# Altium PCB LAB1.PcbDoc
Units mil, origin at the board's own origin, x right, y up, seen from the top; angles counter-clockwise.
Board outline 6000 x 4000 mil, 2 copper layers (Top Layer, Bottom Layer); 35 components, 35 nets, 96 pads, 57 vias.
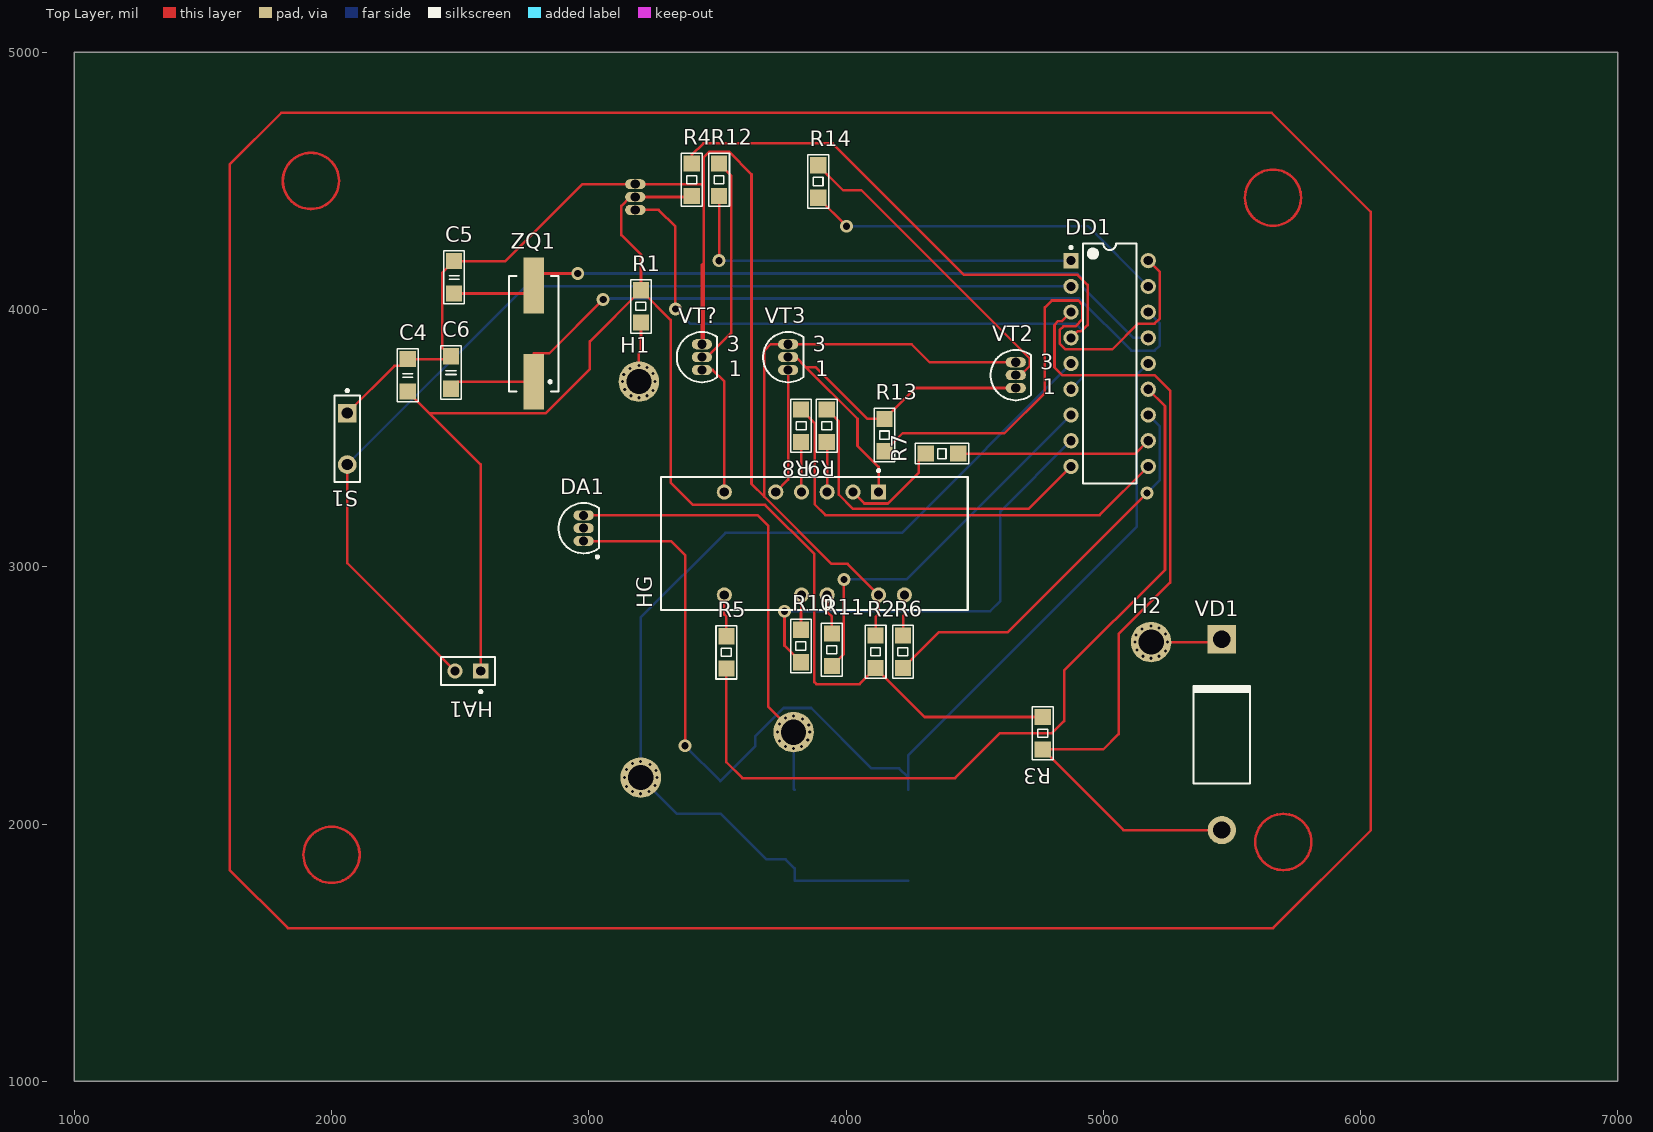
[diagram p0: Top Layer view]
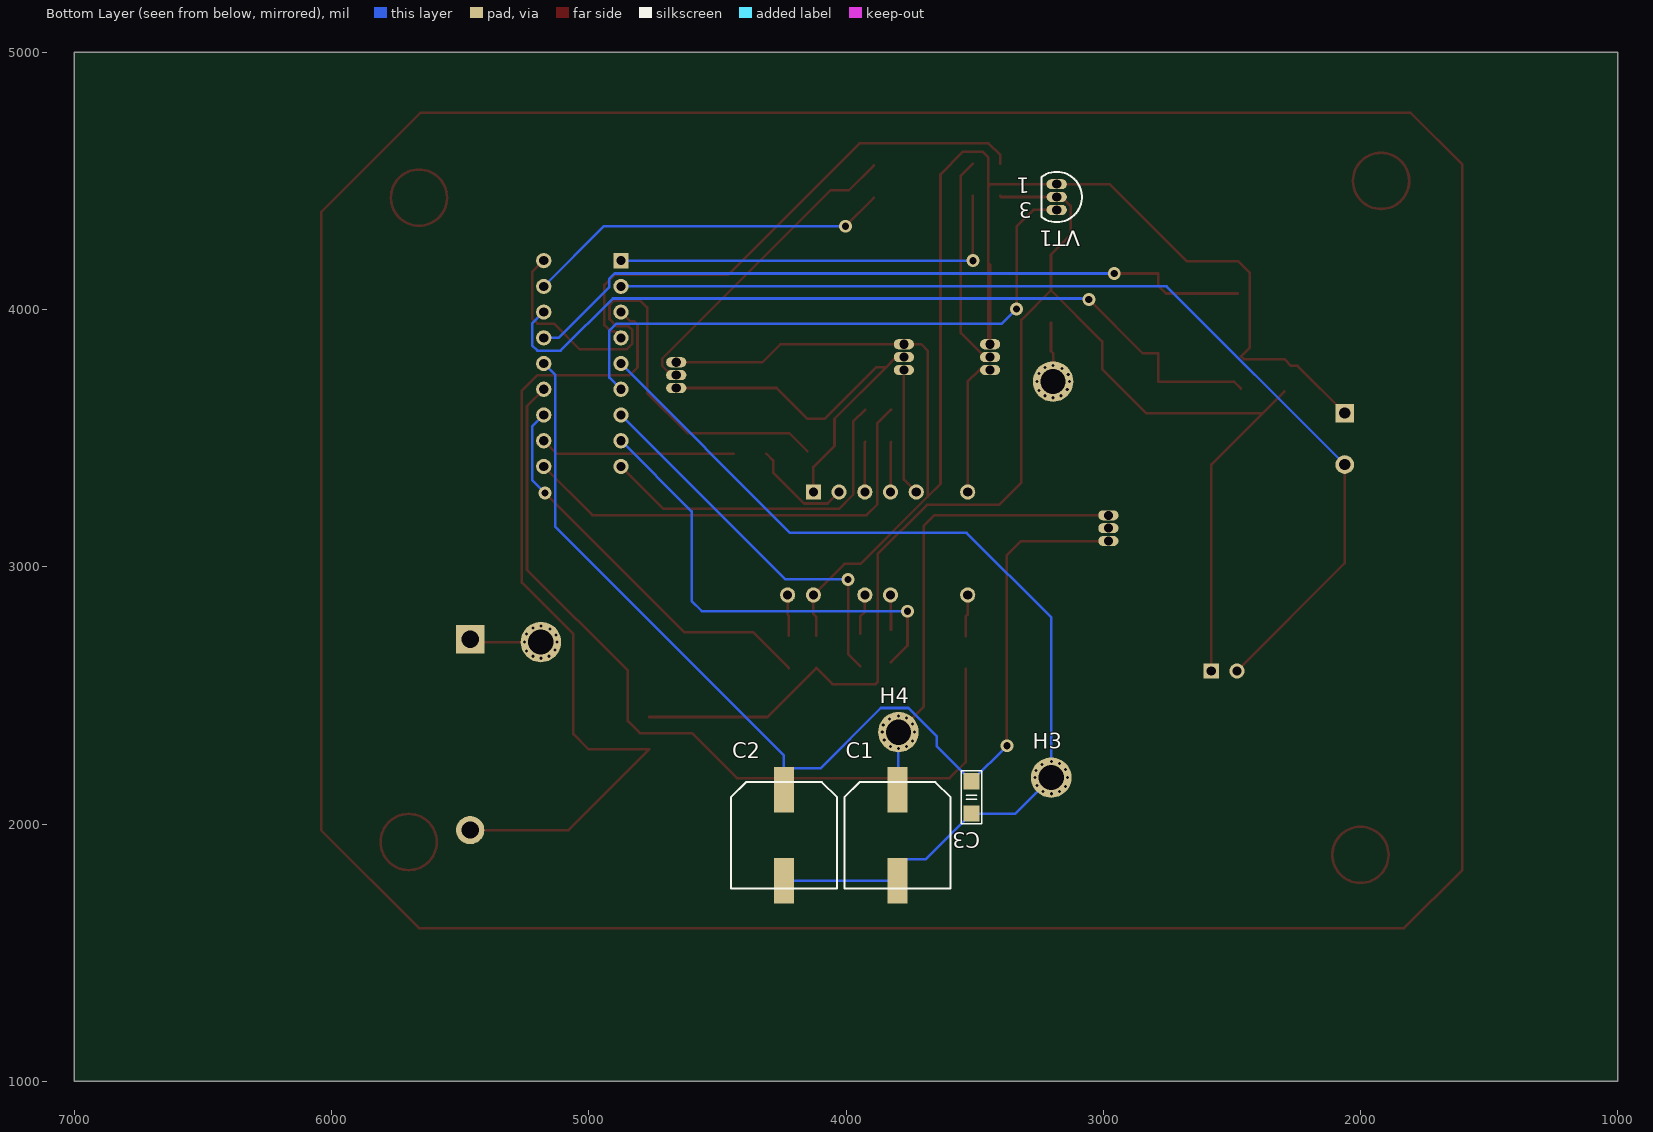
[diagram p1: Bottom Layer view, seen from below]

## Layer stack, top to bottom
Top Solder: solder mask 0.4, Solder Resist, Dk 3.5
Top Layer: signal copper 1.4
Dielectric 1: dielectric 12.6, FR-4, Dk 4.8
Bottom Layer: signal copper 1.4
Bottom Solder: solder mask 0.4, Solder Resist, Dk 3.5

## Board outline
1000,1000 7000,1000 7000,5000 1000,5000

## Design rules (kind name [scope] priority, off if disabled: settings)
Clearance Clearance_1 [All] p1: gap=10 ignorepadtopadclearanceinfootprint=FALSE except(0: Arc-Hole Track-Hole SMDPad-Hole THPad-Hole Via-Hole Fill-Hole Poly-Hole Region-Hole Text-Hole)
Clearance [All] p2: gap=10 ignorepadtopadclearanceinfootprint=FALSE except(0: Arc-Hole Track-Hole SMDPad-Hole THPad-Hole Via-Hole Fill-Hole Poly-Hole Region-Hole Text-Hole)
PolygonConnect [All] p1: connectstyle=Relief reliefconductorwidth=10 reliefentries=4 polygonreliefangle="90 Angle" airgapwidth=10
RoomDefinition LAB1 [InComponentClass('LAB1')] p1: confinementstyle=ConfineIn formatcopy=TRUE lockcomponents=FALSE outline 1001.86,1005.59 6996.86,1005.59 6996.86,4980.59 1001.86,4980.59
RoutingVias [All] p1: holewidth=28 width=50 viastyle="Through Hole" minholewidth=28 minwidth=50 maxholewidth=28 maxwidth=50
SolderMaskExpansion [All] p1: expansion=4 istentingtop=FALSE
Width [All] p1: maxlimit=10 minlimit=10 preferedwidth=10
30 further rules are at their usual default settings.

## Components (designator, comment, footprint, x,y, rotation, side; value= is the part's Value field where it differs from the comment)
C1 "220uF" "CAP AL 470/25" 3799.96,1749.15 r90 bottom
C2 "10uF" "CAP AL 470/25" 4241.22,1749.15 r90 bottom
C3 "0.3uF" "CAPACITOR 1206" 3511.86,2166.57 r270 bottom
C4 "3300" "CAPACITOR 1206" 2296.14,3681.3 r90 top
C5 "22" "CAPACITOR 1206" 2476.46,4062.34 r90 top
C6 "22" "CAPACITOR 1206" 2464.65,3692.28 r90 top
DA1 "L78L05ACZ" TO-92 2980,3150 r0 top
DD1 "PIC16F84A-04I/P" PDIP300-P18 5025,3790 r0 top
H1 "Hole" "Hole 2.5" 3195,3720 r0 top
H2 "Hole" "Hole 2.5" 5186.14,2707.28 r0 top
H3 "Hole" "Hole 2.5" 3201.86,2180.59 r180 bottom
H4 "Hole" "Hole 2.5" 3796.14,2357.28 r180 bottom
HA1 "Speaker" PIN2 2580,2595 r180 top
HG "QDSP-499G" QDSP-4 3876.86,3090.59 r180 top
R1 "27K" "Resistor 1206" 3202.99,3949.03 r90 top
R2 "27K" "Resistor 1206" 4115.17,2606.57 r90 top
R3 "1K" "Resistor 1206" 4765,2415.98 r270 top
R4 "1K" "Resistor 1206" 3400.17,4441.3 r90 top
R5 "1K" "Resistor 1206" 3535,2604.02 r90 top
R6 "1K" "Resistor 1206" 4221.78,2606.57 r90 top
R7 "1K" "Resistor 1206" 4435.98,3440 r180 top
R8 "1K" "Resistor 1206" 3825,3610.98 r270 top
R9 "1K" "Resistor 1206" 3925,3610.98 r270 top
R10 "1K" "Resistor 1206" 3825,2629.02 r90 top
R11 "1K" "Resistor 1206" 3945,2614.02 r90 top
R12 "1K" "Resistor 1206" 3506.78,4441.3 r90 top
R13 "1K" "Resistor 1206" 4150,3449.02 r90 top
R14 "1K" "Resistor 1206" 3891.86,4434.61 r90 top
S1 "SW-PB" SPST-2 2061.14,3497.28 r270 top
VD1 "1N5400" DO-201AD 5461.14,2347.28 r90 top
VT1 "2N3904" TO-92A 3180.85,4437.32 r0 bottom
VT2 "2N3904" TO-92A 4660,3745 r0 top
VT3 "2N3904" TO-92A 3775,3815 r0 top
VT? "2N3904" TO-92A 3440,3815 r0 top
ZQ1 "4MHz" HC49/4H_SMX 2786.56,3906.31 r90 top

## Footprints (in the part's own frame and the unit in brackets; to place one, negate y for a bottom-side part, rotate by r counter-clockwise, add the part's x,y. Pads: shape width x height; smd on the part's side, far side on the other; paste and mask are expansions set on the pad)
"CAP AL 470/25" [mm]
  rect 4.5x2 smd: 0(0.75,0) 1(9.75,0)
  silkscreen extent 0,-5.25 10.5,5.25
"CAPACITOR 1206" [mm]
  rect 1.6x1.6 smd: 1(0,0) 2(3.2,0)
  silkscreen extent -1.02,-1.03 4.22,1.02, body extent 0.01,-0.8 3.22,0.8, height 1.26
DO-201AD [mm] "Diode, Axial; Body 9.5 x 5.6 mm (LxDia. max), Lead Dia. 1.32 mm (max)"
  round 2.8 hole 1.7: 1(-9.42,0)
  rect 2.8x2.8 hole 1.7: 2(9.42,0)
  silkscreen extent -4.8,-2.8 4.9,2.8
HC49/4H_SMX [mm] "Surface Mount Quartz Crystal; Body 13.4 (inc. leads) x 4.9 mm (LxW max)"
  rect 5.5x2 smd: 1(-4.75,0) 2(4.75,0)
  silkscreen extent -5.7,-2.45 5.7,2.45
"Hole 2.5" [mm]
  round 4 hole 2.5: 0(0,0)
PDIP300-P18 [mm] "DIP, 18-Pin, Row Spacing 7.62 mm, Pitch 2.54 mm"
  rect 1.5x1.5 hole 0.9: 1(-3.81,10.16)
  round 1.5 hole 0.9: 2(-3.81,7.62) 3(-3.81,5.08) 4(-3.81,2.54) 5(-3.81,0) 6(-3.81,-2.54) 7(-3.81,-5.08) 8(-3.81,-7.62) 9(-3.81,-10.16) 10(3.81,-10.16) 11(3.81,-7.62) 12(3.81,-5.08) 13(3.81,-2.54) 14(3.81,0) 15(3.81,2.54) 16(3.81,5.08) 17(3.81,7.62) 18(3.81,10.16)
  silkscreen extent -3.93,-11.85 2.65,11.85, body extent -3.6,-11.8 3.6,11.8, height 5.33
PIN2 [mm] "Photosensitive Diode; 2 Leads"
  rect 1.5x1.5 hole 0.9: 1(0,0)
  round 1.5 hole 0.9: 2(2.54,0)
  silkscreen extent -1.4,-1.4 3.94,2.17
QDSP-4 [mm] "LED, 7-Segment Display, 10 mm, Three Digit; 15 Leads (4 Absent); Row Space 10.16 mm; Pitch 2.54 mm"
  rect 1.5x1.5 hole 0.9: 1(-6.35,-5.08)
  round 1.5 hole 0.9: 2(-3.81,-5.08) 3(-1.27,-5.08) 4(1.27,-5.08) 5(3.81,-5.08) 7(8.89,-5.08) 8(8.89,5.08) 11(1.27,5.08) 12(-1.27,5.08) 14(-6.35,5.08) 15(-8.89,5.08)
  silkscreen extent -15.15,-7.32 15.15,6.55
"Resistor 1206" [mm]
  rect 1.6x1.6 smd: 1(0,0) 2(3.2,0)
  silkscreen extent -1.03,-1.03 4.23,1.03, body extent -0.03,-0.79 3.4,0.8, height 0.5
SPST-2 [mm] "Switch; 2 Leads"
  rect 1.85x1.85 hole 1.1: 1(-2.54,0)
  round 1.85 hole 1.1: 2(2.54,0)
  silkscreen extent -4.89,-1.27 4.28,1.27
TO-92 [mm] "TO, Flat Index; 3 In-Line, Axial Leads; Body Dia. 4.7mm; Lead Dia. 0.56 mm (max)"
  oval 2x1 hole 0.9: 1(0,-1.27) 2(0,0) 3(0,1.27)
  silkscreen extent -2.48,-2.95 1.5,2.48, body extent -2.48,-2.5 1.5,2.5, height 4.95
TO-92A [mm] "TO, Flat Index; 3 In-Line, Axial Leads; Body Dia. 4.5mm; Leads 0.51 x 0.48 mm (max)"
  oval 2x1 hole 0.9: 1(0,-1.27) 2(0,0) 3(0,1.27)
  silkscreen extent -2.48,-2.48 1.5,2.48

## Part data
C1 C2: library part "Capasitor polar"
C3 C4 C5 C6: library part Capasitor
DA1: library part CMP-0244-00012-1, "Positive Voltage Regulator, 5V, 3-Pin TO-92", ComponentLink1Description="Manufacturer URL", ComponentLink1URL=http://www.st.com, ComponentLink2Description=Datasheet, ComponentLink2URL=http://www.st.com/internet/com/TECHNICAL_RESOURCES/TECHNICAL_LITERATURE/DATASHEET/CD00000446.pdf, DatasheetVersion=1/02/2011, PackageDescription="TO, Flat Index; 3 In-Line, Axial Leads; Body Dia. 4.7mm; Lead Dia. 0.56 mm (max)", PackageReference=TO-92, PackageVersion=2011
DD1: library part CMP-0115-00205-1, "Enhanced FLASH/EEPROM 8-Bit Microcontroller, 1K (x14-Bit words) FLASH, 68 Bytes RAM, 4 MHz, 18-Pin PDIP, Standard VDD Range, Industrial Temperature", Code_JEDEC=MS-001, DatasheetVersion="revB, Aug-2001", PackageDescription="18-Lead Plastic Dual In-Line (P) - 300 mil Body [PDIP]", PackageReference=PDIP300-P18, PackageVersion="revBB, Aug-2009"
HA1: "Loudspeaker", LatestRevisionDate=17-Jul-2002, LatestRevisionNote="Re-released for DXP Platform.", PackageReference=PIN2, Published=24-Mar-1999, Publisher="Altium Limited"
HG: "10 mm Gray Surface 7-Segment Display: 3-Digit with 2-Colons, CA, Slim Font, Untinted-Diffused without Pin 6 and No DP", LED_Colour=Green, PackageDocument=20-Nov-2001, ComponentLink1Description="Manufacturer Link", ComponentLink1URL=http://www.agilent.com/, ComponentLink2Description=Datasheet, ComponentLink2URL=http://cp.literature.agilent.com/litweb/pdf/5988-4824EN.pdf, DatasheetDocument=20-Nov-2001, LatestRevisionDate=11-Oct-2004, LatestRevisionNote="Display outline superimposed on PCB Footprint.", LuminousIntensity="3200 ucd (Minimum).", Note="No pins are present in positions 6, 9, 10 and 13.", PackageReference=QDSP-4, Published=26-May-2004, Publisher="Altium Limited"
R1 R2 R3 R4 R5 R6 R7 R8 R9 R10 R11 R12 R13 R14: library part Resistor
S1: "Switch", LatestRevisionDate=17-Jul-2002, LatestRevisionNote="Re-released for DXP Platform.", PackageDescription="Switch; 2 Leads", PackageReference=SPST-2, Published=24-Mar-1999, Publisher="Altium Limited"
VD1: "3.0 Ampere General Purpose Rectifier", PackageDocument=Aug-1999, ComponentLink1Description="Manufacturer Link", ComponentLink1URL=http://www.fairchildsemi.com/, ComponentLink2Description=Datasheet, ComponentLink2URL=http://www.fairchildsemi.com/ds/1N%2F1N5400.pdf, DatasheetDocument=1998, LatestRevisionDate=17-Jul-2002, LatestRevisionNote="Re-released for DXP Platform.", PackageReference=DO-201AD, Published=8-Jun-2000, Publisher="Altium Limited"
VT1 VT2 VT3 VT?: "NPN General Purpose Amplifier", ComponentLink1Description="Manufacturer Link", ComponentLink1URL=http://www.fairchildsemi.com/, ComponentLink2Description=Datasheet, ComponentLink2URL=http://www.fairchildsemi.com/ds/2N%2F2N3904.pdf, DatasheetVersion=1997, LatestRevisionDate=17-Jan-2003, LatestRevisionNote="PCB Footprint replaced", PackageDescription="TO, Flat Index; 3 In-Line, Axial Leads; Body Dia. 4.5mm; Leads 0.51 x 0.48 mm (max)", PackageReference=TO-92A, PackageVersion=Sep-1998, Published=8-Jun-2000, Publisher="Altium Limited"
ZQ1: library part HC49/4H_SMX, "Surface Mount Quartz Crystal", PackageDocument=18-Oct-1999, ComponentLink1Description="Manufacturer Link", ComponentLink1URL=http://www.cmac.com/mt/, ComponentLink2Description=Datasheet, ComponentLink2URL=http://www.cmac.com/mt/databook/crystals/smd/hc49_4h_smx.pdf, DatasheetDocument=18-Oct-1999, Note="PCB layout complies with manufacturer's recommendation.", PackageReference=HC49/4H_SMX, Published=17-Jul-2002, Publisher="Altium Limited"

## Via types
v1: diameter 11.81, hole 11.81, Top Layer to Bottom Layer, 48 vias
v2: diameter 50, hole 28, Top Layer to Bottom Layer, 9 vias

## Nets (pads, with @x,y where several pads share a name; then routed paths per layer and width w, separated by ;. In a path a pad name is that pad's centre, name@x,y a point inside that pad or via, vN(x,y) a via of type N, cw(c..) or ccw(c..) an arc to the next point about the centre after c; other vN are vias at no path point)
GND: C4.2 C5.2 C6.2 HG.14 R2.2 S1.1 VT1.1 VT2.3 VT3.3 VT?.3 | length 6903.4
  Top Layer w10: S1.1 2244.65,3780.79 2269.65,3780.79 C4.2 2453.66,3807.28 C6.2 2429.96,3852.96 2429.96,4141.83 C5.2 2675.78,4188.32 2974.78,4487.32 VT1.1 3325.76,4487.32 3326.23,4487.79 3437.88,4487.79 3446.67,4479.01 ; R2.2 4115.17,2805 4126.86,2816.69 HG.14 4006.45,3011 3943.48,3011 3682.34,3272.15 ; VT2.3 4325,3795 4255,3865 VT3.3 3707.34,3865 3682.34,3840 3682.34,3272.15 ; 3446.67,4179.78 3440,4173.11 VT?.3 3446.67,3865 3446.67,4179.78 ; 3446.67,4179.78 3446.67,4479.01 ; 3446.67,4479.01 3446.67,4591.37 3469.08,4613.78 3544.49,4613.78 3632.56,4525.71 3632.56,3321.92 3682.34,3272.15
NetC1_0: C1.0 C2.0 C3.2 DD1.5 H3.0 | length 3939
  Bottom Layer w10: C2.0 C1.0 3799.96,1827.89 3765.59,1862.26 3690.19,1862.26 C3.2 3341.86,2040.59 H3.0 v1(3201.86,2243.58) 3201.86,2802.86 3531,3132 4217,3132 DD1.5
  other v1: 3201.86,2117.6 3170.37,2125.47 3233.36,2125.47 3146.75,2145.16 3256.98,2149.09 3138.87,2180.59 3264.86,2180.59 3260.92,2208.15 3146.75,2212.09 3237.3,2231.77 3170.37,2235.71
NetC1_1: C1.1 DA1.3 H4.0 | length 1803.2
  Top Layer w10: DA1.3 3657,3200 3697,3160 3697,2456.42 H4.0
  Bottom Layer w10: H4.0 v1(3796.14,2294.29) 3796.14,2136.83 C1.1
  other v1: 3764.65,2302.16 3827.64,2302.16 3741.02,2321.85 3851.26,2325.79 3733.15,2357.28 3859.13,2357.28 3855.2,2384.84 3741.02,2388.78 3831.58,2408.46 3764.65,2412.4 3796.14,2420.27
NetC2_1: C2.1 C3.1 DA1.1 DD1.14 | length 4378
  Top Layer w10: DA1.1 3320,3100 3374.44,3045.56 v2(3374.44,2304)
  Bottom Layer w10: v2(3374.44,2304) C3.1 3647.84,2302.55 3647.84,2341.55 3757.31,2451.02 3864.87,2451.02 4099.3,2216.59 4206.85,2216.59 C2.1@4241.22,2182.22 ; C2.1 C2.1@4241.22,2182.22 ; DD1.14 5130,3745 5130,3154.78 4241.22,2266 C2.1@4241.22,2182.22
NetC4_1: C4.1 HA1.1 R1.2 R2.1 R3.1 R4.1 VT1.2 | length 5898.7
  Top Layer w10: C4.1 2381.4,3596.04 ; HA1.1 2580,3397.44 2381.4,3596.04 ; R4.1 3396.19,4437.32 VT1.2 3161.17,4437.32 3126.48,4402.64 3126.48,4289.86 3202.99,4213.34 R1.2 ; R3.1 4305.76,2415.98 R2.1 4052.6,2544 3885,2544 3877,2552 3877,3049.2 3685.2,3241 3405,3241 3318,3328 3318,3960.01 R1.2 ; 2381.4,3596.04 2832.15,3596.04 3004.32,3768.21 3004.32,3876.34 R1.2
NetC5_1: C5.1 DD1.15 ZQ1.2 | length 2880.9
  Top Layer w10: C5.1 2755.58,4062.34 ZQ1.2 2786.56,4140 v2(2957,4140)
  Bottom Layer w10: v2(2957,4140) 4900,4140 4920,4120 4920,4087 5117,3890 DD1.15
NetC6_1: C6.1 DD1.16 ZQ1.1 | length 3206.4
  Top Layer w10: C6.1 2491.67,3719.31 ZQ1.1 2786.56,3830 2847,3830 v2(3056,4039)
  Bottom Layer w10: v2(3056,4039) 3059.96,4042.96 4906.04,4042.96 5109,3840 5200,3840 5220,3860 5220,3945 DD1.16
NetDD1_1: DD1.1 R12.1 | length 1619.5
  Top Layer w10: v2(3506.79,4190) R12.1
  Bottom Layer w10: v2(3506.79,4190) DD1.1
NetDD1_2: DD1.2 HA1.2 S1.2 | length 4076.6
  Top Layer w10: S1.2 2061.14,3013.86 HA1.2
  Bottom Layer w10: S1.2 2753.86,4090 DD1.2
NetDD1_3: DD1.3 R3.2 VD1.1 | length 3301.1
  Top Layer w10: DD1.3 4839.53,3954.53 4825,3954.53 4810.47,3940 4810.47,3774.53 4840,3745 5200,3745 5260,3685 5260,2938 5060,2738 5060,2350 5000,2290 R3.2 5078.58,1976.42 VD1.1
NetDD1_4: DD1.4 R4.2 | length 2059.9
  Top Layer w10: R4.2 3400.17,4600 3446.17,4646 3948,4646 4459,4135 4900,4135 4939.53,4095.47 4939.53,3940 4915.8,3916.28 4901.28,3916.28 DD1.4
NetDD1_6: DD1.6 VT1.3 | length 2367.6
  Top Layer w10: VT1.3 3271.68,4387.32 3337,4322 v2(3337,4002)
  Bottom Layer w10: v2(3337,4002) 3394,3945 4893,3945 4920,3918 4920,3735 DD1.6
NetDD1_7: DD1.7 R11.1 | length 1504.1
  Top Layer w10: R11.1 3992,2661.02 v2(3992,2951)
  Bottom Layer w10: v2(3992,2951) 4236,2951 DD1.7
NetDD1_8: DD1.8 R10.1 | length 1817
  Top Layer w10: v2(3761,2827) 3761,2693.02 R10.1
  Bottom Layer w10: v2(3761,2827) 4560,2827 4600,2867 4600,3215 DD1.8
NetDD1_9: DD1.9 R9.1 | length 1343.8
  Top Layer w10: R9.1 3972,3563.98 3972,3280 4026,3226 4711,3226 DD1.9
NetDD1_10: DD1.10 R8.1 | length 1782.6
  Top Layer w10: R8.1 3878,3557.98 3878,3243 3920,3201 4986,3201 DD1.10
NetDD1_11: DD1.11 R7.1 | length 759.7
  Top Layer w10: R7.1 5125,3440 DD1.11
NetDD1_12: DD1.12 R6.1 | length 1572.4
  Top Layer w10: R6.1 4361.21,2746 4629,2746 v2(5170,3287)
  Bottom Layer w10: v2(5170,3287) 5220,3337 5220,3545 DD1.12
NetDD1_13: DD1.13 R5.1 | length 3273.9
  Top Layer w10: R5.1 3535,2240 3597,2178 4424,2178 4599,2353 4801,2353 4848,2400 4848,2596 5240,2988 5240,3625 DD1.13
NetDD1_17: DD1.17 R14.1 | length 1425.9
  Top Layer w10: R14.1 v2(4002.47,4324)
  Bottom Layer w10: v2(4002.47,4324) 4941,4324 DD1.17
NetDD1_18: DD1.18 R13.1 | length 2120.9
  Top Layer w10: R13.1 4219.98,3519 4616,3519 4773,3676 4773,4008 4800,4035 4903,4035 4919.53,4018.47 4919.53,3962.53 4891.53,3934.53 4845,3934.53 4830.47,3920 4830.47,3867.53 4853,3845 5035,3845 5135,3945 5200,3945 5220,3965 5220,4145 DD1.18
NetH1_0: H1.0 R1.1 | length 232.3
  Top Layer w10: H1.0 v1(3195,3782.99) 3195,3830 3202.99,3837.99 R1.1
  other v1: 3195,3657.01 3163.5,3664.88 3226.5,3664.88 3250.12,3684.57 3139.88,3688.5 3132.01,3720 3257.99,3720 3135.94,3747.56 3250.12,3751.5 3159.57,3771.18 3226.5,3775.12
NetH2_0: H2.0 VD1.2 | length 279.5
  Top Layer w10: H2.0 v1(5249.13,2707.28) 5450.28,2707.28 VD1.2
  other v1: 5186.14,2644.29 5154.65,2652.16 5217.64,2652.16 5241.26,2671.85 5131.02,2675.79 5123.15,2707.28 5127.09,2734.84 5241.26,2738.78 5150.71,2758.46 5217.64,2762.4 5186.14,2770.27
NetHG_1: HG.1 R13.2 VT2.1 VT3.2 | length 1635.2
  Top Layer w10: VT3.2 3805.19,3815 3845.19,3775 ; HG.1 4126.86,3387.95 4044.79,3470.02 4044.79,3575.4 3845.19,3775 ; VT2.1 4270,3695 R13.2 4083.07,3575 3883.07,3775 3845.19,3775
NetHG_2: HG.2 R7.2 | length 409.2
  Top Layer w10: HG.2 4071.39,3246.06 4162.6,3246.06 4283.5,3366.96 4283.5,3413.5 R7.2
NetHG_3: HG.3 R9.2 | length 195.2
  Top Layer w10: R9.2 3926.86,3483.14 HG.3
NetHG_4: HG.4 R8.2 | length 195.2
  Top Layer w10: R8.2 3826.86,3483.14 HG.4
NetHG_5: HG.5 VT3.1 | length 494.3
  Top Layer w10: HG.5 3775,3338.73 VT3.1
NetHG_7: HG.7 VT?.1 | length 534.9
  Top Layer w10: VT?.1 3481.86,3765 3526.86,3720 HG.7
NetHG_8: HG.8 R5.2 | length 164
  Top Layer w10: HG.8 3526.86,2814.14 3535,2806 R5.2
NetHG_11: HG.11 R10.2 | length 136.4
  Top Layer w10: R10.2 3825,2821 3826.86,2822.86 HG.11
NetHG_12: HG.12 R11.2 | length 158.1
  Top Layer w10: HG.12 3926.86,2824.14 3945,2806 R11.2
NetHG_15: HG.15 R6.2 | length 160.1
  Top Layer w10: R6.2 4221.79,2809 4226.86,2814.08 HG.15
NetR12_2: R12.2 VT?.2 | length 830
  Top Layer w10: VT?.2 3459.69,3815 3553.28,3908.6 3553.28,4520.79 R12.2
NetR14_2: R14.2 VT2.2 | length 1231.5
  Top Layer w10: R14.2 3988.7,4463.75 4059.98,4463.75 4714.37,3809.37 4714.37,3780.63 4678.74,3745 VT2.2
pads on no net: DA1.2
copper on no net: | length 17257.4
  Top Layer w10: 1605,1820 1605,4565 1805,4765 5655,4765 6040,4380 6040,1975 5660,1595 1830,1595 1605,1820 ; 2029.2,4500 ccw(c1920,4500) 2029.2,4500 ; 2109.2,1880 ccw(c2000,1880) 2109.2,1880 ; 5769.2,4435 ccw(c5660,4435) 5769.2,4435 ; 5809.2,1930 ccw(c5700,1930) 5809.2,1930

## Text inside footprints (layer, text, board x,y; h text height)
VT1: Bottom Overlay "3" at 3276.52,4417.24 h59.05 r180; Bottom Overlay "1" at 3285.58,4512.13 h59.05 r180
VT2: Top Overlay "3" at 4755.67,3765.08 h59.05; Top Overlay "1" at 4764.72,3670.2 h59.05
VT3: Top Overlay "3" at 3870.67,3835.08 h59.05; Top Overlay "1" at 3879.72,3740.2 h59.05
VT?: Top Overlay "3" at 3535.67,3835.08 h59.05; Top Overlay "1" at 3544.72,3740.2 h59.05